# Altium PCB TSFF5210.PcbDoc
Units mm, origin at the board's own origin, x right, y up, seen from the top; angles counter-clockwise.
Board outline 14.25 x 33.25 mm, 2 copper layers (Top Layer, Bottom Layer), stack 1.58 mm thick; 9 components, 7 nets, 28 pads, 0 vias.
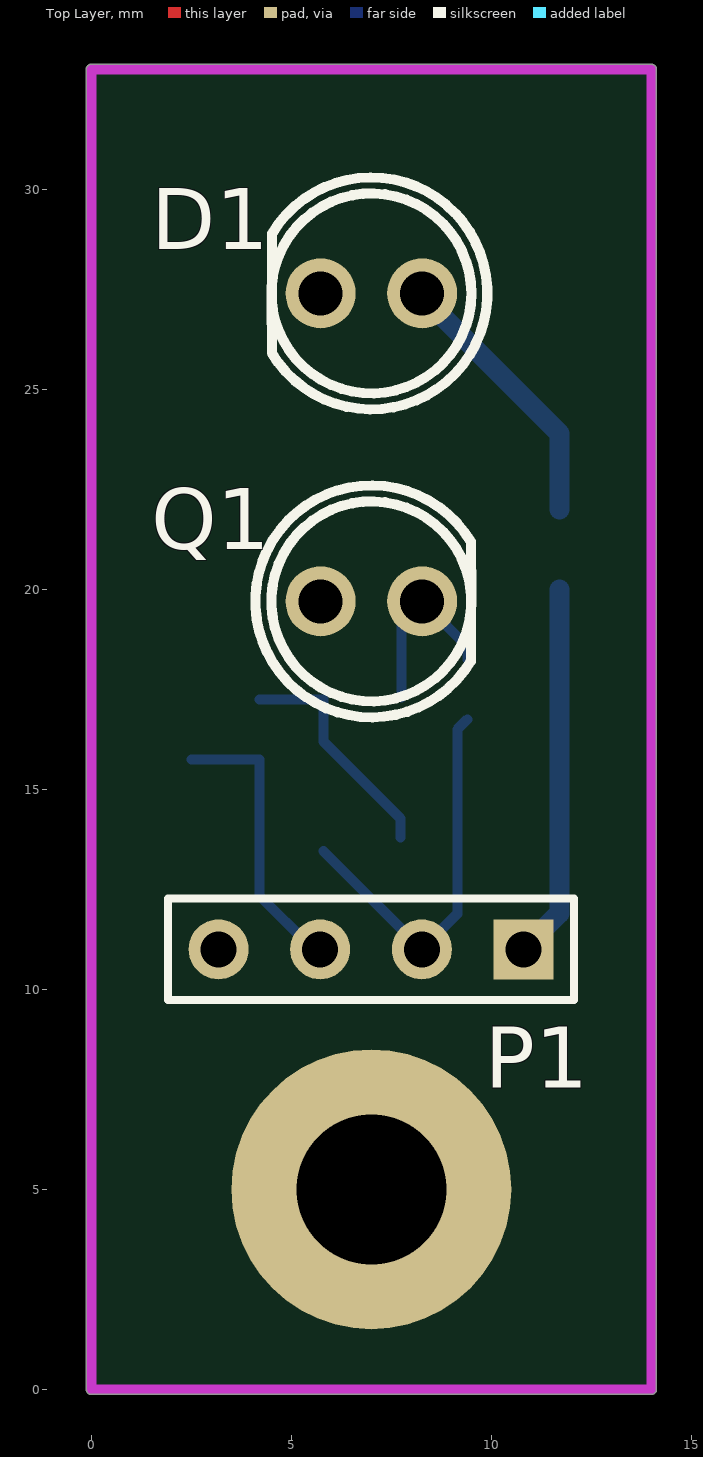
[diagram p0: Top Layer view]
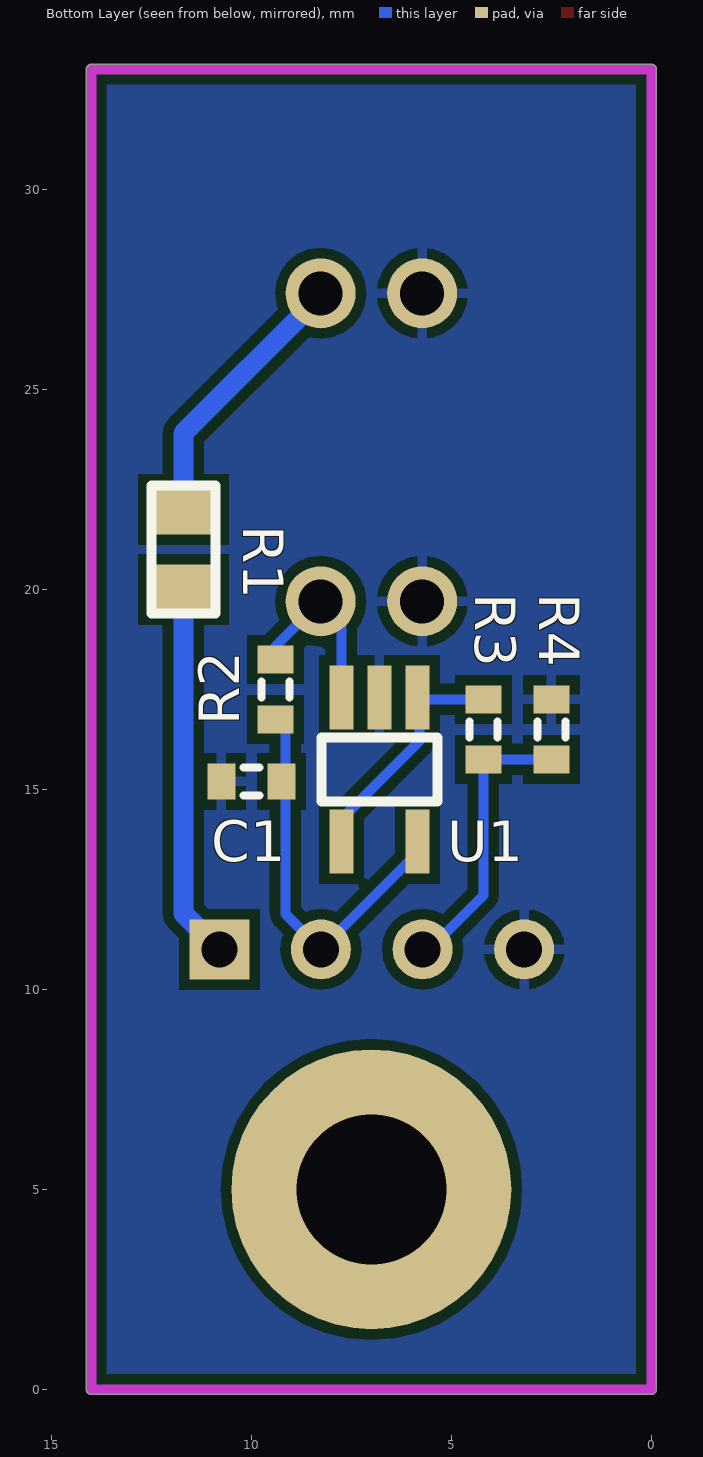
[diagram p1: Bottom Layer view, seen from below]

## Layer stack, top to bottom
Top Solder: solder mask 0.0102, Solder Resist, Dk 3.5
Top Layer: signal copper 0.0356
Dielectric 1: dielectric 1.5086, FR-4, Dk 4.8
Bottom Layer: signal copper 0.0356
Bottom Solder: solder mask 0.0102, Solder Resist, Dk 3.5

## Board outline
0,-0.127 cw(c0,0) -0.127,0 -0.127,33 cw(c0,33) 0,33.127 14,33.127 cw(c14,33) 14.127,33 14.127,32.999 ccw(c14,33) 14.127,33 14.127,32.999 14.127,0 cw(c14,0) 14,-0.127

## Design rules (kind name [scope] priority, off if disabled: settings)
Clearance [All] p1: gap=0.254 ignorepadtopadclearanceinfootprint=FALSE except(0: Arc-Hole Track-Hole SMDPad-Hole THPad-Hole Via-Hole Fill-Hole Poly-Hole Region-Hole Text-Hole)
PolygonConnect [All] p1: connectstyle=Relief reliefconductorwidth=0.254 reliefentries=4 polygonreliefangle="90 Angle" airgapwidth=0.254
RoutingVias [All] p1: holewidth=0.711 width=1.27 viastyle="Through Hole" minholewidth=0.711 minwidth=1.27 maxholewidth=0.711 maxwidth=1.27
SolderMaskExpansion [All] p1: expansion=0.102
Width [All] p1: maxlimit=0.75 minlimit=0.254 preferedwidth=0.254
30 further rules are at their usual default settings.

## Components (designator, comment, footprint, x,y, rotation, side; value= is the part's Value field where it differs from the comment)
C1 "Cap" J1-0603 10,15.2 r180 bottom value=0.1uF
D1 "LED0" LED-5mm 7,27.4 r180 top
P1 "Header 4" HDR1X4 10.8,11 r180 top
Q1 "Photo NPN" LED-5mm 7,19.7 r0 top
R1 "Res3" 1206 11.7,21 r90 bottom value=33
R2 "Res3" J1-0603 9.4,17.5 r270 bottom value=470
R3 "Res3" J1-0603 4.2,16.5 r90 bottom value=1.78k
R4 "Res3" J1-0603 2.5,16.5 r270 bottom value=1K
U1 "TLV314IDBVT" SOT23-5 6.8,15.5 r270 bottom

## Footprints (in the part's own frame and the unit in brackets; to place one, negate y for a bottom-side part, rotate by r counter-clockwise, add the part's x,y. Pads: shape width x height; smd on the part's side, far side on the other; paste and mask are expansions set on the pad)
1206 [mm]
  rect 1.25x1.75 smd: 1(1,0) 2(-1,0)
  silkscreen extent -1.6,-0.8 1.6,0.8, body extent -1.65,-0.89 1.65,0.89, height 0.55
HDR1X4 [mm] "Connector; Header; 4 Position"
  rect 1.5x1.5 hole 0.9: 1(0,0)
  round 1.5 hole 0.9: 2(2.54,0) 3(5.08,0) 4(7.62,0)
  silkscreen extent -1.27,-1.27 8.89,1.27
J1-0603 [mm] "Chip Resistor, Body 1.6x0.8mm, IPC High Density"
  rect 0.7x0.9 smd: 1(-0.75,0) 2(0.75,0)
  silkscreen extent -0.2,-0.35 0.2,0.35, body extent -0.85,-0.48 0.85,0.48, height 0.9
LED-5mm [mm]
  round 1.75 hole 1.1: 1(-1.27,0) 2(1.27,0)
  silkscreen extent -2.9,-2.9 2.5,2.9, body extent -2.9,-2.9 2.9,2.9, height 8.75
SOT23-5 [mm]
  rect 1.6x0.6 smd: 1(-1.8,0.95) 2(-1.8,0) 3(-1.8,-0.95) 4(1.8,-0.95) 5(1.8,0.95)
  silkscreen extent -0.8,-1.45 0.8,1.45, body extent -0.8,-1.5 0.8,1.5, height 1.1

## Part data
C1: "Capacitor", Supplier Part Number 1=311-1088-1-ND, LatestRevisionDate=17-Jul-2002, LatestRevisionNote="Re-released for DXP Platform.", PackageDescription="Radial Cap, Thru-Hole; 2 Leads; 0.3 in Pin Spacing", PackageReference=RAD-0.3, Published=8-Jun-2000, Publisher="Altium Limited", Supplier 1=Digi-Key
D1: "Typical INFRARED GaAs LED", Supplier Part Number 1=751-1207-ND, LatestRevisionDate=08-Jul-2005, LatestRevisionNote="Mech Layer 1 removed.", PackageDescription="LED; 2 Leads", PackageReference=LED-0, Published=8-Jun-2000, Publisher="Altium Limited", Supplier 1=Digi-Key
P1: "Header, 4-Pin", LatestRevisionDate=17-Jul-2002, LatestRevisionNote="Re-released for DXP Platform.", Publisher="Altium Limited"
Q1: "NPN Phototransistor", Code_JEDEC=TO-220-AC, LatestRevisionDate=17-Jul-2002, LatestRevisionNote="Re-released for DXP Platform.", PackageReference=TO-220_A, Published=24-Mar-1999, Publisher="Altium Limited"
R1: "Resistor", Supplier Part Number 1=RHM33.0AFCT-ND, Tolerance=1%, LatestRevisionDate=29-May-2009, LatestRevisionNote="IPC-7351 Footprint Added.", PackageDescription="Chip Resistor", PackageReference=J1-0603, Published=8-Jun-2000, Publisher="Altium Limited", Supplier 1=Digi-Key
R2: "Resistor", Supplier Part Number 1=311-47.0HRCT-ND, Tolerance=1%, LatestRevisionDate=29-May-2009, LatestRevisionNote="IPC-7351 Footprint Added.", PackageDescription="Chip Resistor", PackageReference=J1-0603, Published=8-Jun-2000, Publisher="Altium Limited", Supplier 1=Digi-Key
R3: "Resistor", Supplier Part Number 1=311-17.8KHRCT-ND, Tolerance=1%, LatestRevisionDate=29-May-2009, LatestRevisionNote="IPC-7351 Footprint Added.", PackageDescription="Chip Resistor", PackageReference=J1-0603, Published=8-Jun-2000, Publisher="Altium Limited", Supplier 1=Digi-Key
R4: "Resistor", Supplier Part Number 1=311-1.00KHRCT-ND, Tolerance=1%, LatestRevisionDate=29-May-2009, LatestRevisionNote="IPC-7351 Footprint Added.", PackageDescription="Chip Resistor", PackageReference=J1-0603, Published=8-Jun-2000, Publisher="Altium Limited", Supplier 1=Digi-Key

## Free pads (board coordinates)
  round 0.55 all layers, no hole: 6(7,5) 7(7,5) 8(7,5) 9(7,5)
  round 7 hole 3.75: 10(7,5)

## Nets (pads, with @x,y where several pads share a name; then routed paths per layer and width w, separated by ;. In a path a pad name is that pad's centre, name@x,y a point inside that pad or via, vN(x,y) a via of type N, cw(c..) or ccw(c..) an arc to the next point about the centre after c; other vN are vias at no path point)
GND: C1.1 D1.2 P1.4 Q1.1 R4.1 U1.2
NetD1_1: D1.1 R1.1 | length 6.8
  Bottom Layer w0.5: D1.1@8.409,27.4 8.409,27.191 11.7,23.9 R1.1
NetQ1_2: Q1.2 R2.1 U1.3 | length 4.5
  Bottom Layer w0.254: U1.3 7.75,19.18 Q1.2 9.4,18.57 R2.1
NetR3_2: R3.2 U1.1 U1.4 | length 5.8
  Bottom Layer w0.254: R3.2 5.8,17.25 5.8,16.2 7.725,14.275 U1.4@7.725,13.8
OUT: P1.3 R3.1 R4.2 | length 6.9
  Bottom Layer w0.254: R4.2 R3.1 4.2,12.348 P1.3@5.485,11.063
VCC: C1.2 P1.2 R2.2 U1.5 | length 9.7
  Bottom Layer w0.254: U1.5@5.8,13.46 P1.2 9.15,11.89 9.15,16.5 R2.2
VLED: P1.1 R1.2 | length 9.6
  Bottom Layer w0.5: P1.1@10.565,11.063 10.863,11.063 11.7,11.9 R1.2

## Polygon pours and split planes (outlines as drawn)
GND on Bottom Layer "Bottom Layer-GND" (solid, pour order 0): 0,33 14,33 14,0 0,0

## Keep-outs
Keep-Out Layer:
  lines w0.254: 0,0 14,0 14,33 0,33 0,0

## Silkscreen, mask and mechanical layers (free items; w line width, h text height)
Mechanical 1:
  drawing of 191 lines, arcs and shapes, not listed
  text "Layer" at -39.547,94.206 h1.52
  text "Name" at -29.135,94.206 h1.52
  text "Material" at -5.52,94.206 h1.52
  text "Thickness" at 16.318,94.206 h1.52
  text "Constant" at 32.824,94.206 h1.52
  text "Board Layer Stack" at 47.298,94.206 h1.52
  text "1" at -39.547,91.158 h1.52
  text "Top Overlay" at -29.135,91.158 h1.52
  text "2" at -39.547,88.11 h1.52
  text "Top Solder" at -29.135,88.11 h1.52
  text "Solder Resist" at -5.52,88.11 h1.52
  text "0.40mil" at 16.318,88.11 h1.52
  text "3.5" at 32.824,88.11 h1.52
  text "3" at -39.547,85.062 h1.52
  text "Top Layer" at -29.135,85.062 h1.52
  text "Copper" at -5.52,85.062 h1.52
  text "1.40mil" at 16.318,85.062 h1.52
  text "4" at -39.547,82.014 h1.52
  text "Dielectric 1" at -29.135,82.014 h1.52
  text "FR-4" at -5.52,82.014 h1.52
  text "59.39mil" at 16.318,82.014 h1.52
  text "4.8" at 32.824,82.014 h1.52
  text "5" at -39.547,78.966 h1.52
  text "Bottom Layer" at -29.135,78.966 h1.52
  text "Copper" at -5.52,78.966 h1.52
  text "1.40mil" at 16.318,78.966 h1.52
  text "6" at -39.547,75.918 h1.52
  text "Bottom Solder" at -29.135,75.918 h1.52
  text "Solder Resist" at -5.52,75.918 h1.52
  text "0.40mil" at 16.318,75.918 h1.52
  text "3.5" at 32.824,75.918 h1.52
  text "7" at -39.547,72.87 h1.52
  text "Bottom Overlay" at -29.135,72.87 h1.52
Drill Drawing:
  circle w0.254: c-96.319,48.837 r0.847
  lines w0.254: -97.166,51.8 -95.472,51.8 -95.472,53.493 -97.166,53.493 -97.166,51.8 ; -97.166,57.303 -95.472,57.303 -96.319,55.61 -97.166,57.303
  lines w0.381: -98.684,46.847 167.282,46.847 ; -98.684,58.277 167.282,58.277 ; -84.692,43.037 -84.692,62.087 ; -72.503,43.037 -72.503,62.087 ; -43.302,43.037 -43.302,62.087 ; -30.452,43.037 -30.452,62.087 ; -11.814,43.037 -11.814,62.087 ; 26.275,43.037 26.275,62.087 ; 41.257,43.037 41.257,62.087 ; 60.2,43.037 60.2,62.087 ; 76.706,43.037 76.706,62.087 ; 98.392,43.037 98.392,62.087 ; 132.265,43.037 132.265,62.087 ; -98.684,43.037 167.282,43.037 167.282,62.087 -98.684,62.087 -98.684,43.037
  text "Symbol" at -96.398,59.42 h1.83
  text "Count" at -83.549,59.42 h1.83
  text "Hole Size" at -71.36,59.42 h1.83
  text "Plated" at -42.159,59.42 h1.83
  text "Hole Type" at -29.309,59.42 h1.83
  text "Drill Layer Pair" at -10.671,59.42 h1.83
  text "Via/Pad" at 27.418,59.42 h1.83
  text "Pad Shape" at 42.4,59.42 h1.83
  text "Template" at 61.343,59.42 h1.83
  text "Description" at 77.849,59.42 h1.83
  text "Hole Tolerance (+)" at 99.535,59.42 h1.83
  text "Hole Tolerance (-)" at 133.408,59.42 h1.83
  text "1" at -83.549,55.61 h1.52
  text "3.750mm (147.64mil)" at -71.36,55.61 h1.52
  text "PTH" at -42.159,55.61 h1.52
  text "Round" at -29.309,55.61 h1.52
  text "Top Layer - Bottom Layer" at -10.671,55.61 h1.52
  text "Pad" at 27.418,55.61 h1.52
  text "Rounded" at 42.4,55.61 h1.52
  text "c700h375" at 61.343,55.61 h1.52
  text "4" at -83.549,51.8 h1.52
  text "0.900mm (35.43mil)" at -71.36,51.8 h1.52
  text "PTH" at -42.159,51.8 h1.52
  text "Round" at -29.309,51.8 h1.52
  text "Top Layer - Bottom Layer" at -10.671,51.8 h1.52
  text "Pad" at 27.418,51.8 h1.52
  text "(Mixed)" at 42.4,51.8 h1.52
  text "(Mixed)" at 61.343,51.8 h1.52
  text "4" at -83.549,47.99 h1.52
  text "1.100mm (43.31mil)" at -71.36,47.99 h1.52
  text "PTH" at -42.159,47.99 h1.52
  text "Round" at -29.309,47.99 h1.52
  text "Top Layer - Bottom Layer" at -10.671,47.99 h1.52
  text "Pad" at 27.418,47.99 h1.52
  text "Rounded" at 42.4,47.99 h1.52
  text "c175h110" at 61.343,47.99 h1.52
  text "9 Total" at -83.549,44.18 h1.52